# Altium PCB Steering_Converter_1R2.PcbDoc
Units mm, origin at the board's own origin, x right, y up, seen from the top; angles counter-clockwise.
Board outline 45.34 x 38.23 mm, 2 copper layers (Top Layer, Bottom Layer); 26 components, 23 nets, 105 pads, 24 vias.
Unrouted connection lines stored in the file: 23.
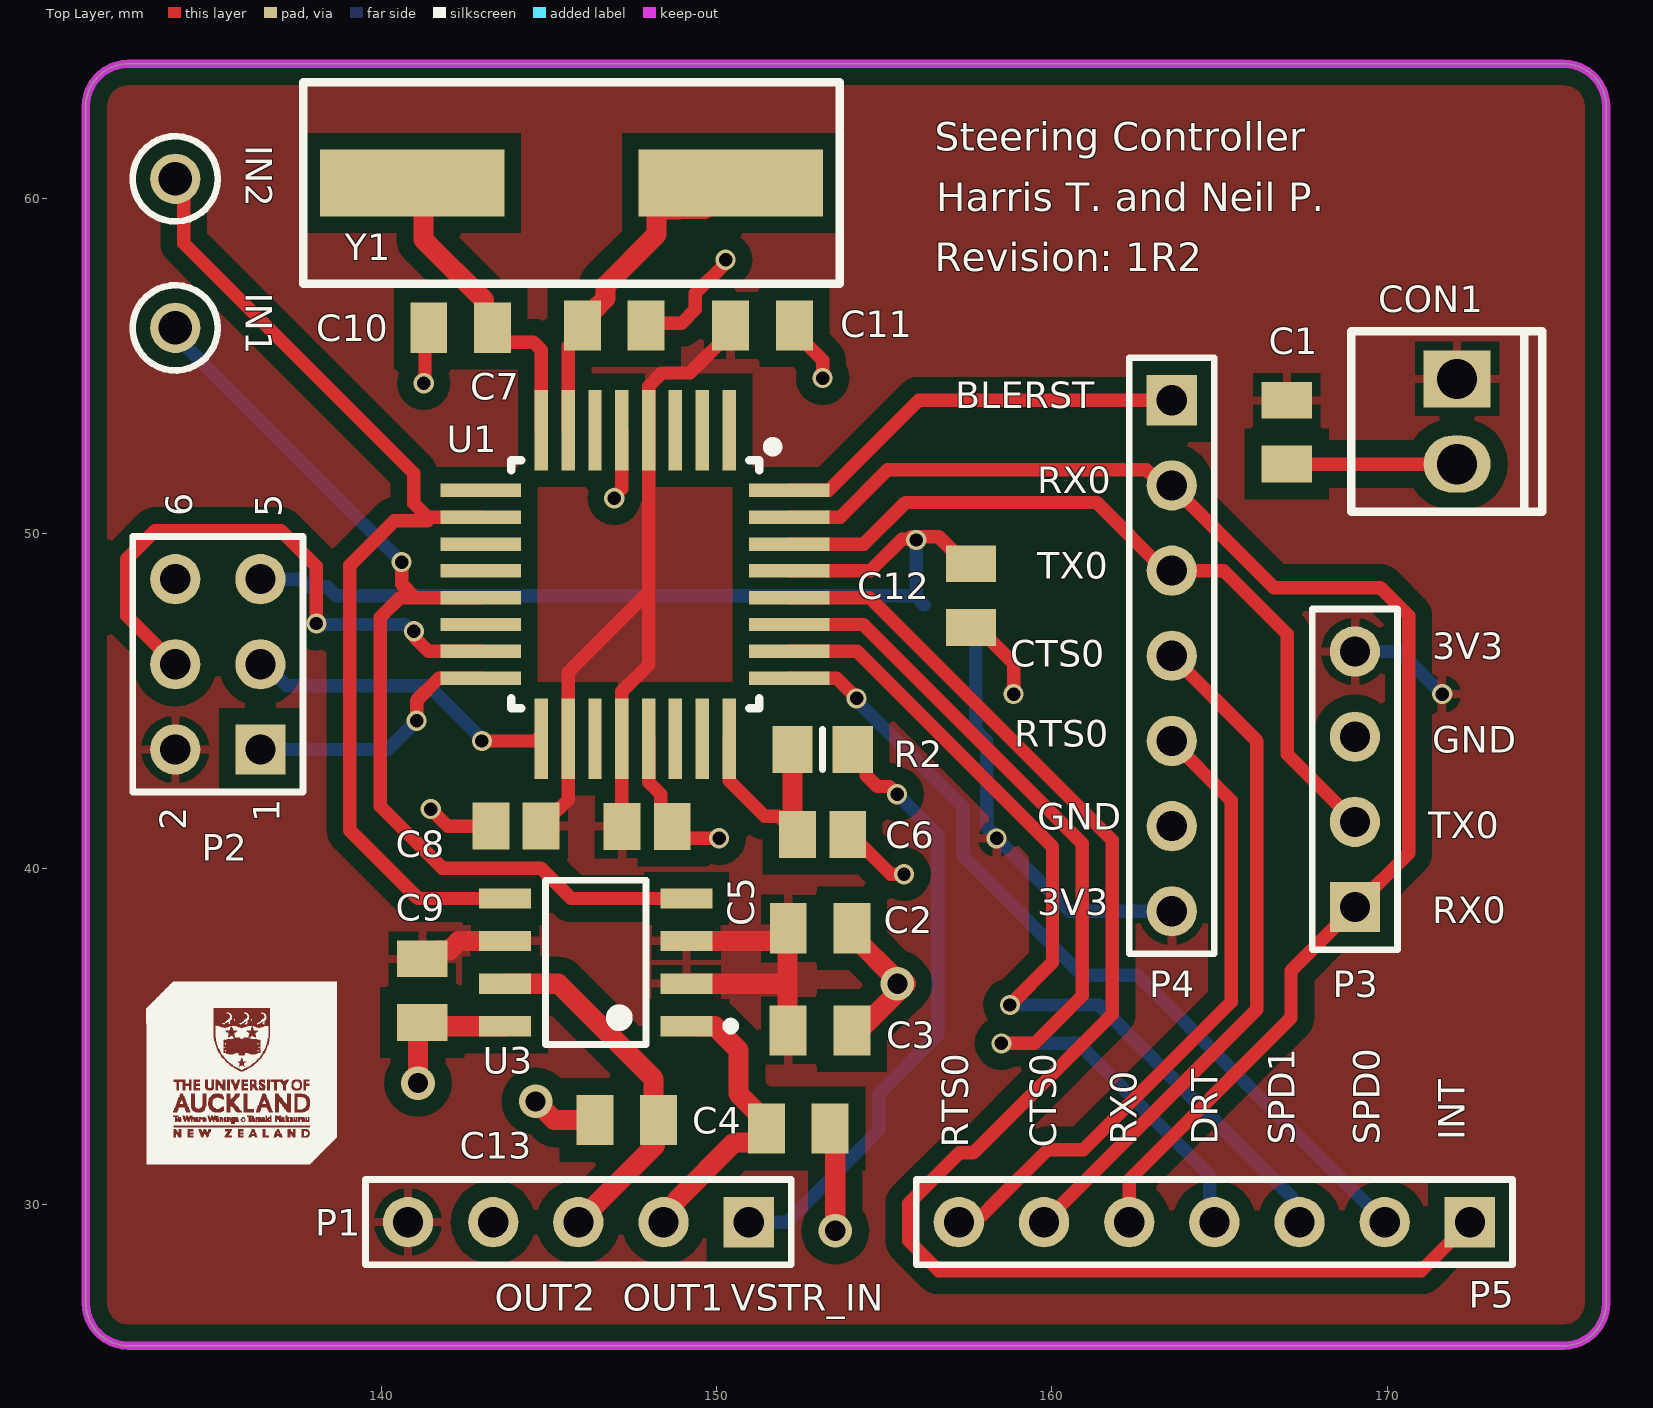
[diagram p0: Top Layer view]
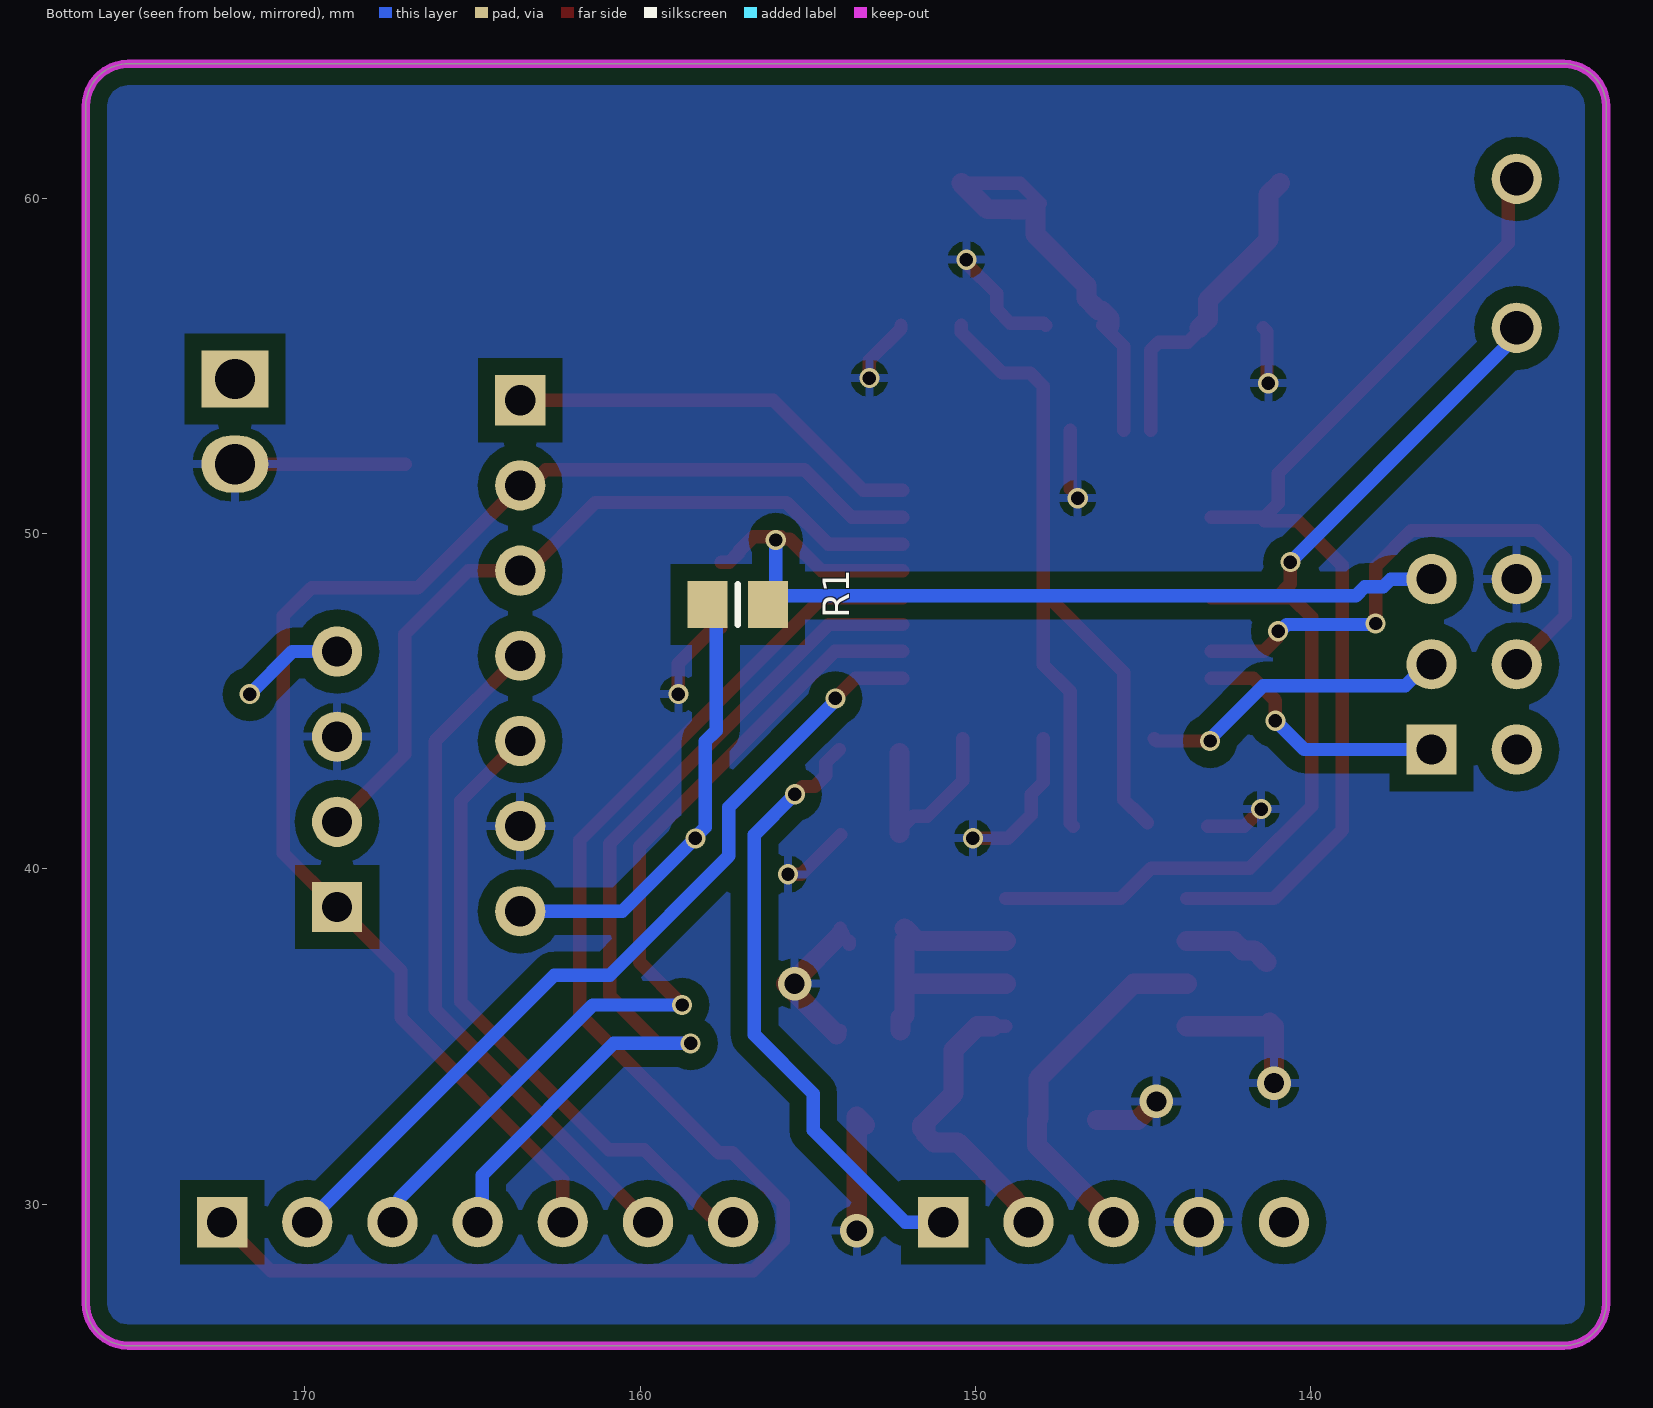
[diagram p1: Bottom Layer view, seen from below]

## Layer stack, top to bottom
Top Solder: solder mask 0.0102, Solder Resist, Dk 3.5
Top Layer: signal copper 0.0356
Dielectric 1: dielectric 0.32, FR-4, Dk 4.8
Bottom Layer: signal copper 0.0356
Bottom Solder: solder mask 0.0102, Solder Resist, Dk 3.5

## Board outline
131.191,27.051 131.191,62.738 cw(c132.461,62.738) 132.461,64.008 175.26,64.008 cw(c175.26,62.738) 176.53,62.738 176.53,27.051 cw(c175.26,27.051) 175.26,25.781 132.461,25.781 cw(c132.461,27.051)

## Design rules (kind name [scope] priority, off if disabled: settings)
Clearance Clearance_1 [InNamedPolygon('NONET_L01_P001') Or InNamedPolygon('GND_L02_P003')] p1: gap=0.4 ignorepadtopadclearanceinfootprint=FALSE
Clearance [All] p2: gap=0.5 ignorepadtopadclearanceinfootprint=TRUE except(0.3: Track-Track Track-SMDPad)
MinimumSolderMaskSliver [All] p1: minsoldermaskwidth=0.196
PolygonConnect [All] p1: connectstyle=Relief reliefconductorwidth=0.254 reliefentries=4 polygonreliefangle="90 Angle" airgapwidth=0.254
RoutingVias [All] p1: holewidth=0.711 width=1.27 viastyle="Through Hole" minholewidth=0.711 minwidth=1.27 maxholewidth=0.711 maxwidth=1.27
SilkToSolderMaskClearance [IsPad] p1: minsilkscreentomaskgap=0.2 clearancetoexposedcopper=TRUE
SolderMaskExpansion [All] p1: expansion=0.102 istentingtop=FALSE
Width [All] p1: maxlimit=0.6 minlimit=0.4 preferedwidth=0.4
28 further rules are at their usual default settings.

## Components (designator, comment, footprint, x,y, rotation, side; value= is the part's Value field where it differs from the comment)
C1 "Capacitor 0805" C0805#1 167.005,53.025 r90 top
C2 "100n" C0805#1 153.088,38.227 r180 top value=?
C3 "100n" C0805#1 153.084,35.179 r180 top value=?
C4 "100n" C0805#1 152.439,32.258 r180 top value=?
C5 "100n" C0805#2 147.929,41.27 r180 top value=?
C6 "100n" C0805#2 153.162,41.021 r180 top value=?
C7 "18p" C0805#1 146.95,56.207 r180 top value=?
C8 "100n" C0805#2 144.018,41.275 r0 top value=?
C9 "1u" C0805#1 141.224,36.369 r90 top value=?
C10 "18p" C0805#1 142.367,56.134 r0 top value=?
C11 "100n" C0805#1 151.369,56.207 r180 top value=?
C12 "100n" C0805#1 157.588,48.149 r90 top value=?
C13 "100n" C0805#1 147.32,32.512 r0 top value=?
CON1 "Header 2X1" HDR2X1_2P54 172.085,54.61 r0 top
IN1 "5003" TP_TH 133.858,56.134 r270 top
IN2 "5003" TP_TH 133.858,60.579 r270 top
P1 "Header 5" HDR1X5 150.96,29.464 r180 top
P2 "" HDR2X3 136.398,43.561 r90 top
P3 "Header 4" HDR1X4 169.037,38.862 r90 top
P4 "BLE Header" HDR1X7 163.576,53.975 r270 top
P5 "Header 7" HDR1X7 172.466,29.464 r180 top
R1 "Resistor 0805" R0805 157.088,47.879 r0 bottom value=?
R2 "Resistor 0805" R0805 153.162,43.561 r180 top value=?
U1 "ATMega328PB" TQFP32 147.574,48.487 r270 top
U3 "IC_Diodes_ZXBM5210-S-13_eec" Diodes_ZXBM5210-S-13_0 146.398,37.211 r90 top
Y1 "SMT-XTAL 8MHz" HC49-US 145.669,60.452 r180 top

## Footprints (in the part's own frame and the unit in brackets; to place one, negate y for a bottom-side part, rotate by r counter-clockwise, add the part's x,y. Pads: shape width x height; smd on the part's side, far side on the other; paste and mask are expansions set on the pad)
C0805#1 [mm]
  rect 1.1x1.5 smd: 1(-0.95,0) 2(0.95,0)
  body extent -1.1,-0.72 1.1,0.72, height 1.1
C0805#2 [mm] "Chip Capacitor, Body 2.0x1.3mm, IPC High Density"
  rect 1.1x1.4 smd: 1(-0.75,0) 2(0.75,0)
  body extent -1.1,-0.72 1.1,0.72, height 1.4
Diodes_ZXBM5210-S-13_0 [mm]
  rect 0.6x1.55 smd paste+0 mask+0: 1(-1.905,-2.7) 2(-0.635,-2.7) 3(0.635,-2.7) 4(1.905,-2.7) 5(1.905,2.7) 6(0.635,2.7) 7(-0.635,2.7) 8(-1.905,2.7)
  silkscreen extent -2.45,-4.15 2.45,1.5
HC49-US [mm] "20Mhz Crystal"
  rect 5.5x2 smd: 1(-4.75,0) 2(4.75,0)
  silkscreen extent -8,-3 8,3, body extent -4.79,-2.4 4.79,2.4, height 3.8
HDR1X4 [mm] "Connector; Header; 4 Position"
  rect 1.5x1.5 hole 0.9: 1(0,0)
  round 1.5 hole 0.9: 2(2.54,0) 3(5.08,0) 4(7.62,0)
  silkscreen extent -1.27,-1.27 8.89,1.27
HDR1X5 [mm] "Connector; Header; 5 Position"
  rect 1.5x1.5 hole 0.9: 1(0,0)
  round 1.5 hole 0.9: 2(2.54,0) 3(5.08,0) 4(7.62,0) 5(10.16,0)
  silkscreen extent -1.27,-1.27 11.43,1.27
HDR1X7 [mm] "Connector; Header; 7 Position"
  rect 1.5x1.5 hole 0.9: 1(0,0)
  round 1.5 hole 0.9: 2(2.54,0) 3(5.08,0) 4(7.62,0) 5(10.16,0) 6(12.7,0) 7(15.24,0)
  silkscreen extent -1.27,-1.27 16.51,1.27
HDR2X1_2P54 [mm] "Polarised Header 2 way"
  rect 2x1.7 hole 1.2: 1(0,0)
  oval 2x1.7 hole 1.2: 2(0,-2.54)
  silkscreen extent -3.16,-3.96 2.54,1.42, body extent -3.3,-3.64 3.17,1.44, height 9.99
HDR2X3 [mm] "Connector; Header; 3x2 Position"
  rect 1.5x1.5 hole 0.9: 1(0,0)
  round 1.5 hole 0.9: 2(0,2.54) 3(2.54,0) 4(2.54,2.54) 5(5.08,0) 6(5.08,2.54)
  silkscreen extent -1.27,-1.27 6.35,3.81
R0805 [mm]
  rect 1.2x1.4 smd: 1(-0.9,0) 2(0.9,0)
  silkscreen extent 0,-0.6 0,0.6, body extent -1.07,-0.7 1.07,0.7, height 0.65
TP_TH [mm] "Test Point, Through Hole, Dia 2.54mm"
  round 1.5 hole 1: 1(0,0)
  silkscreen extent -1.27,-1.27 1.27,1.27, body extent -1.27,-1.27 1.27,1.27, height 4.57
TQFP32 [mm]
  rect 2.4x0.4 smd: 1(-4.6,2.8) 2(-4.6,2) 3(-4.6,1.2) 4(-4.6,0.4) 5(-4.6,-0.4) 6(-4.6,-1.2) 7(-4.6,-2) 8(-4.6,-2.8) 17(4.6,-2.8) 18(4.6,-2) 19(4.6,-1.2) 20(4.6,-0.4) 21(4.6,0.4) 22(4.6,1.2) 23(4.6,2) 24(4.6,2.8)
  rect 0.4x2.4 smd: 9(-2.8,-4.6) 10(-2,-4.6) 11(-1.2,-4.6) 12(-0.4,-4.6) 13(0.4,-4.6) 14(1.2,-4.6) 15(2,-4.6) 16(2.8,-4.6) 25(2.8,4.6) 26(2,4.6) 27(1.2,4.6) 28(0.4,4.6) 29(-0.4,4.6) 30(-1.2,4.6) 31(-2,4.6) 32(-2.8,4.6)
  silkscreen extent -4.24,-3.7 3.7,4.24, body extent -3.5,-3.5 3.5,3.5, height 1.3

## Part data
C1: library part CCAP0805, "CCAP0805"
C2 C3 C4 C5 C6 C7 C8 C9 C10 C11 C12 C13: library part CCAP0805, "CCAP0805", MPN=?, Part Description=?, Type="Surface Mount"
  C5: Supplier 1=Digi-Key
CON1: library part HDR2X1
IN1 IN2: library part TestPoint, "Test Point, Orange, 1-Pin THD, RoHS", Forward Current="3 A", Forward Voltage="1.08 V", Max Operating Temperature="150 degC", Max Surge Current="80 A", Min Operating Temperature="-65 degC", Package Quantity=500, Peak Reverse Current="600 uA", ComponentLink1Description="Manufacturer URL", ComponentLink1URL=http://www.keyelco.com/, ComponentLink2Description=Datasheet, ComponentLink2URL=http://keyelco.com/userAssets/file/M65p56.pdf, DatasheetVersion=Jun-15, Diameter="5.3 mm", Height="0.25 inch", Length="9.5 mm", Mount="Through Hole", PackageDescription="1-Pin Through Hole Device, Dia 2.54 mm", PackageReference=5003, Packaging=Bulk, Pins=2, Radiation Hardening=No, REACH SVHC="No SVHC", RoHSCompliant=true, Weight="0.01 lb", Width="0.25 inch"
P1: "Header, 5-Pin", LatestRevisionDate=17-Jul-2002, LatestRevisionNote="Re-released for DXP Platform.", Publisher="Altium Limited"
P2: library part "Header 3X2", "Header, 3-Pin, Dual row", LatestRevisionDate=17-Jul-2002, LatestRevisionNote="Re-released for DXP Platform.", Publisher="Altium Limited"
P3: "Header, 4-Pin", LatestRevisionDate=17-Jul-2002, LatestRevisionNote="Re-released for DXP Platform.", Publisher="Altium Limited"
P4: library part "Header 7", "Header, 7-Pin", LatestRevisionDate=17-Jul-2002, LatestRevisionNote="Re-released for DXP Platform.", Publisher="Altium Limited"
P5: "Header, 7-Pin", LatestRevisionDate=17-Jul-2002, LatestRevisionNote="Re-released for DXP Platform.", Publisher="Altium Limited"
R1 R2: library part RES0805, "RES0805", MPN=?, Part Description=?, Type="Surface Mount"
U1: "IC MCU 8BIT 32KB FLASH 32TQFP", Supplier Part Number 1=ATMEGA328PB-AU-ND, Supplier 1=Digi-Key, Supplier 2=Digi-Key, Supplier 3=Digi-Key, Supplier 4=Digi-Key
U3: "IC MOTOR DRIVER PWM 8SOIC", Digikey Part Number=ZXBM5210-S-13DICT-ND, Manufacturer=Diodes, Mouser Part Number=621-ZXBM5210-S-13, Package=SO-8, Part Number=ZXBM5210-S-13, Temperature="-40°C to +85°C", Temperature Range High=+85°C, Temperature Range Low=-40°C, Voltage=18V, ComponentLink1Description=Upverter, ComponentLink1URL=https://upverter.com/upn/revision/7a867377f73a3c32/, ComponentLink2Description=Datasheet, ComponentLink2URL=https://www.diodes.com/assets/Datasheets/ZXBM5210.pdf, Digikey Description="IC MOTOR DRIVER PWM 8SOIC", helpURL=https://upverter.com/upn/revision/7a867377f73a3c32/, Lead Free=yes, Price=0.759009212461, RoHS=TRUE, Supplier 1=Digi-Key, Supplier 2=Mouser, Supplier Part Number 1=ZXBM5210-S-13DICT-ND, Supplier Part Number 2=621-ZXBM5210-S-13
Y1: library part TXC9C-16_XTAL_SMT, "9C-16.000MAAJ-T crystal 16.0000MHZ 18PF SMD", Frequency Stability=±30ppm, Load Capacitance=18pF, Manufacturer="TXC CORPORATION", Manufacturer Part Number=9C-16.000MAAJ-T, Operating Mode=Fundamental, Operating Temperature="-20°C ~ 70°C", Package / Case=HC-49/US, Ratings=-, Supplier Part Number 1=887-1059-1-ND, Category="Crystals, Oscillators, Resonators", ComponentLink1Description=http://www.txccorp.com/download/products/quartz_crystals/2015TXC_9C_32.pdf, ComponentLink1URL=http://www.txccorp.com/download/products/quartz_crystals/2015TXC_9C_32.pdf, Frequency Tolerance=±30ppm, Height - Seated (Max)="0.161\" (4.10mm)", Mounting Type="Surface Mount", Packaging="Cut Tape (CT)", Part Status=Active, Pricing 1="1=0.75, 10=0.628, 50=0.5656, 100=0.5026, 500=0.47744 (NZD)", RoHS="RoHS Compliant", Size / Dimension="0.449\" L x 0.189\" W (11.40mm x 4.80mm)", Stock 1=11514, Supplier 1=Digi-Key, Type="MHz Crystal"

## Via types
v1: diameter 0.6, hole 0.4, Top Layer to Bottom Layer, 20 vias
v2: diameter 1, hole 0.6, Top Layer to Bottom Layer, 4 vias

## Nets (pads, with @x,y where several pads share a name; then routed paths per layer and width w, separated by ;. In a path a pad name is that pad's centre, name@x,y a point inside that pad or via, vN(x,y) a via of type N, cw(c..) or ccw(c..) an arc to the next point about the centre after c; other vN are vias at no path point)
3V3: C1.2 C2.2 C3.2 C5.2 C8.2 C9.2 C11.2 CON1.1 P1.5 P2.2 P3.4 P4.7 R1.2 U1.4 U1.18 U1.20 U3.2 U3.3 U3.6 | length 52.7
  Top Layer w0.4: C8.2@144.868,41.375 145.318,41.825 145.34,41.825 145.574,42.059 U1.18@145.574,43.787 ; U1.18 145.574,45.86 147.974,48.26 ; C5.2@147.079,41.27 147.174,41.365 U1.20 147.174,45.289 147.974,46.089 147.974,48.26 ; C11.2 150.419,56.007 149.199,54.787 148.367,54.787 147.974,54.394 U1.4 147.974,48.26 ; P4.7 P4.7@163.786,38.525
  Top Layer w0.6: C9.2@141.324,37.219 141.674,37.569 142.027,37.569 142.304,37.846 U3.6 ; U3.2 152.111,36.576 ; U3.3 151.73,37.846 C2.2@152.111,38.227 ; C3.2@152.111,35.629 152.111,36.576 ; C2.2@152.111,37.846 152.111,36.576 ; C3.2@152.165,35.629 152.234,35.56 C3.2@152.234,35.179
  Bottom Layer w0.4: R1.2@157.734,47.23 157.734,44.125 158.053,43.806 158.053,41.244 158.353,40.944 v1(158.353,40.91) 160.528,38.735 P4.7 ; P3.4@168.833,46.482 170.37,46.482 v1(171.641,45.212)
BLE_RST: P4.1 U1.32 | length 13.1
  Top Layer w0.4: U1.32 153.341,51.287 156.029,53.975 P4.1
  Bottom Layer w0.6: P4.1 P4.1@163.957,54.356
CTS_0: P4.4 P5.6 | length 20.6
  Top Layer w0.4: P5.6 166.116,35.814 166.116,43.815 P4.4
DRT: P5.4 U1.27 | length 28.3
  Top Layer w0.4: U1.27 154.38,47.287 160.909,40.758 160.909,36.222 159.485,34.798 v1(158.496,34.798)
  Bottom Layer w0.4: v1(158.496,34.798) 160.782,34.798 164.712,30.868 164.712,29.598 P5.4
GND: C1.1 C2.1 C3.1 C4.1 C5.1 C6.1 C7.1 C8.1 C9.1 C10.1 C11.1 C12.1 C13.1 CON1.2 P1.4 P2.6 P3.3 P4.6 U1.5 U1.21 U3.8 | length 40.3
  Top Layer w0.4: v1(141.267,54.483) 141.305,54.521 141.305,56.022 C10.1 ; v1(141.478,41.783) 141.986,41.275 C8.1@143.068,41.275 ; v2(144.605,33.068) v2@144.661,33.012 ; C13.1 C13.1@146.47,32.512 ; v1@146.95,51.108 147.174,51.332 U1.5 ; C7.1 147.968,56.275 148.957,56.275 149.369,56.687 149.369,57.164 150.269,58.064 v1(150.269,58.166) ; U1.21 147.974,42.58 148.332,42.222 148.332,41.615 149.029,40.918 150.074,40.918 v1(150.077,40.915) ; C11.1@152.219,56.207 152.219,56.107 153.162,55.164 v1(153.162,54.635) ; C2.1@153.758,37.746 C2.1@153.758,37.846 ; C6.1@154.012,41.021 155.194,39.839 v1(155.591,39.839) ; C3.1 C3.1@154.144,35.069 ; C2.1@154.038,38.027 C2.1 ; C12.1 157.788,47.199 158.861,46.126 v1(158.861,45.212) ; C1.1 167.007,52.072 172.083,52.072 CON1.2
  Top Layer w0.6: v2(141.097,33.612) 141.097,35.292 C9.1 141.337,35.306 U3.8 ; v2@144.661,33.012 145.161,32.512 C13.1 ; C4.1@153.289,32.358 153.539,32.608 v2(153.539,29.21) ; C2.1@154.038,38.027 155.391,36.674 v2(155.391,36.576) ; C3.1@154.144,35.069 155.651,36.576 v2@155.489,36.576
  other v1: 146.95,51.054
IN1: IN1.1 U1.13 U3.4 | length 29.9
  Top Layer w0.4: v1(140.61,49.149) 140.61,48.497 141.02,48.087 ; U1.13 141.02,48.087 ; U3.4 145.669,39.116 144.76,40.025 141.822,40.025 139.974,41.873 139.974,47.501 140.56,48.087 141.02,48.087
  Bottom Layer w0.4: IN1.1@133.884,55.875 135.403,54.356 v1(140.61,49.149)
IN2: IN2.1 U1.10 U3.5 | length 31
  Top Layer w0.4: IN2.1@134.239,60.579 134.112,60.452 134.112,58.66 140.974,51.798 140.974,50.903 141.39,50.487 141.857,50.487 U1.10 ; 141.39,50.387 140.394,50.387 139.067,49.06 139.067,41.146 141.097,39.116 U3.5
MISO: P2.1 U1.16 | length 7.9
  Top Layer w0.4: v1(141.053,44.417) 141.053,45.022 141.718,45.687 U1.16
  Bottom Layer w0.4: P2.1 140.198,43.561 v1(141.053,44.417) v1@140.958,44.417
MOSI: P2.4 U1.15 | length 17.3
  Top Layer w0.4: P2.4 132.408,47.551 132.408,49.242 133.257,50.091 136.999,50.091 138.067,49.023 v1(138.067,47.319) ; v1(140.974,47.087) 141.012,47.049 141.012,46.875 141.4,46.487 U1.15
  Bottom Layer w0.4: v1(138.067,47.319) 138.099,47.287 140.72,47.287 140.92,47.087 v1(140.974,47.087)
OUT1: C4.2 P1.2 U3.1 | length 9.1
  Top Layer w0.4: U3.1 U3.1@149.479,35.306
  Top Layer w0.6: P1.2 148.42,29.708 148.853,30.141 148.853,30.164 150.531,31.843 151.239,31.843 151.489,32.093 C4.2 ; U3.1@149.479,35.306 149.947,35.306 150.65,34.603 150.65,33.297 151.589,32.358 C4.2@151.589,32.258
OUT2: C13.2 P1.3 U3.7 | length 10.8
  Top Layer w0.6: U3.7 145.288,36.576 148.125,33.739 148.125,32.557 148.17,32.512 148.17,31.754 P1.3
RST: C12.2 P2.5 R1.1 U1.29 | length 28
  Top Layer w0.4: U1.29 154.584,48.887 155.534,49.837 v1@155.956,49.837 ; v1@155.81,49.899 156.634,49.899 157.038,49.495 157.038,49.449 157.342,49.145 C12.2@157.588,49.145
  Bottom Layer w0.4: P2.5 137.617,48.641 137.843,48.415 138.385,48.415 138.651,48.149 R1.1@155.918,48.149 ; v1(155.956,49.809) 155.956,48.111 R1.1
RTS_0: P4.5 P5.7 | length 19
  Top Layer w0.4: P5.7@157.6,29.54 157.734,29.674 157.926,29.674 158.316,30.065 159.874,31.623 160.935,31.623 165.354,36.042 165.354,42.037 P4.5
RX_0: P3.1 P4.2 P5.5 U1.31 | length 42.4
  Top Layer w0.4: U1.31 153.685,50.487 155.097,51.899 162.815,51.899 163.278,51.435 P4.2 166.624,48.387 169.799,48.387 170.641,47.545 170.641,40.466 P3.1 167.132,36.957 167.132,35.56 162.306,30.734 P5.5
SCK: P2.3 U1.17 | length 9.3
  Top Layer w0.4: v1(143.002,43.815) 144.602,43.815 U1.17@144.674,43.887
  Bottom Layer w0.4: P2.3 136.547,46.101 137.182,45.466 141.419,45.466 143.002,43.883 v1(143.002,43.815)
SPD_0: P5.2 U1.25 | length 25.4
  Top Layer w0.4: U1.25 153.583,45.687 154.178,45.092 v1(154.178,45.085)
  Bottom Layer w0.4: v1(154.178,45.085) 154.178,45.011 157.353,41.836 157.353,40.386 160.909,36.83 162.56,36.83 P5.2
SPD_1: P5.3 U1.26 | length 27.1
  Top Layer w0.4: U1.26 154.19,46.487 160.02,40.657 160.02,37.211 v1(158.75,35.941)
  Bottom Layer w0.4: v1(158.75,35.941) 161.417,35.941 167.176,30.182 167.176,29.674 P5.3
ST_INT: P5.1 U1.28 | length 45
  Top Layer w0.4: U1.28 154.57,48.087 161.798,40.859 161.798,35.67 157.661,31.533 157.244,31.533 155.731,30.02 155.731,28.908 156.625,28.014 171.016,28.014 P5.1
TX_0: P3.2 P4.3 U1.30 | length 23.4
  Top Layer w0.4: U1.30 154.394,49.687 155.634,50.927 161.334,50.927 163.366,48.895 165.126,48.895 167.022,46.999 167.022,43.417 P3.2
VSTR_IN: P1.1 R2.1 | length 18.4
  Top Layer w0.4: R2.1 154.462,43.161 154.462,42.785 154.79,42.456 155.156,42.456 v1(155.386,42.226)
  Bottom Layer w0.4: P1.1 152.096,29.464 154.838,32.206 154.838,33.297 156.591,35.05 156.591,41.021 v1(155.386,42.226)
VSTR_OUT: C6.2 R2.2 U1.24 | length 6.4
  Top Layer w0.4: U1.24 150.374,42.631 151.434,41.571 151.862,41.571 152.212,41.221 C6.2@152.212,41.021 ; R2.2@152.262,43.461 R2.2
  Top Layer w0.6: C6.2@152.262,41.071 R2.2@152.262,43.461
X1: C7.2 U1.7 Y1.1 | length 12.9
  Top Layer w0.4: U1.7 145.574,55.581 C7.2@146.2,56.207 ; Y1.1@148.072,59.855 148.669,60.452 Y1.1
  Top Layer w0.6: C7.2 146,56.407 146.25,56.657 146.336,56.657 146.687,57.008 146.687,57.394 148.206,58.913 148.206,59.657 149.643,59.676 Y1.1
X2: C10.2 U1.8 Y1.2 | length 9.2
  Top Layer w0.4: C10.2@143.444,55.93 143.667,55.707 144.54,55.707 144.774,55.473 U1.8
  Top Layer w0.6: Y1.2 141.256,60.115 141.256,58.769 143.067,56.958 143.067,56.384 C10.2
pads on no net: U1.1 U1.2 U1.3 U1.6 U1.9 U1.11 U1.12 U1.14 U1.19 U1.22 U1.23

## Polygon pours and split planes (outlines as drawn)
3V3 on Top Layer "3V3_L01_P001" (solid, remove dead copper, pour order 1): 131.191,62.992 cw(c132.207,62.992) 132.207,64.008 175.26,64.008 cw(c175.26,62.738) 176.53,62.738 176.53,27.051 cw(c175.26,27.051) 175.26,25.781 132.461,25.781 cw(c132.461,27.051) 131.191,27.051
GND on Bottom Layer "GND_L02_P002" (solid, remove dead copper, pour order 2): 131.205,62.929 131.205,63.066 cw(c132.093,63.066) 132.093,63.953 175.205,63.953 ccw(c175.205,64.008) 175.26,64.008 cw(c175.26,62.738) 176.53,62.738 176.53,27.051 cw(c175.26,27.051) 175.26,25.781 132.147,25.781 cw(c132.147,25.836) 132.093,25.836 cw(c132.093,26.737) 131.191,26.737 131.191,27.051

## Keep-outs
Keep-Out Layer:
  lines w0.254: 131.191,27.051 ccw(c132.461,27.051) 132.461,25.781 175.26,25.781 ccw(c175.26,27.051) 176.53,27.051 176.53,62.738 ccw(c175.26,62.738) 175.26,64.008 172.339,64.008 132.461,64.008 ccw(c132.461,62.738) 131.191,62.738 131.191,27.051

## Silkscreen, mask and mechanical layers (free items; w line width, h text height)
Top Overlay:
  drawing of 24 lines, arcs and shapes, not listed
  text "Steering Controller" at 156.507,61.413 h0.85
  text "Harris T. and Neil P." at 156.556,59.606 h0.85
  text "Revision: 1R2" at 156.507,57.828 h0.85
  text "BLERST" at 157.122,53.744 h0.8
  text "RX0" at 159.557,51.204 h0.8
  text "TX0" at 159.557,48.648 h0.8
  text "3V3" at 171.346,46.251 h0.8
  text "CTS0" at 158.757,46.029 h0.8
  text "RTS0" at 158.884,43.639 h0.8
  text "GND" at 171.346,43.457 h0.8
  text "GND" at 159.557,41.171 h0.8
  text "TX0" at 171.219,40.917 h0.8
  text "3V3" at 159.557,38.615 h0.8
  text "RX0" at 171.346,38.377 h0.8
  text "INT" at 172.316,31.9 h0.8 r90
  text "RX0" at 162.537,31.773 h0.8 r90
  text "DRT" at 164.95,31.773 h0.8 r90
  text "SPD1" at 167.236,31.773 h0.8 r90
  text "SPD0" at 169.776,31.773 h0.8 r90
  text "RTS0" at 157.511,31.683 h0.8 r90
  text "CTS0" at 160.124,31.683 h0.8 r90
  text "OUT2" at 143.389,26.82 h0.8
  text "OUT1" at 147.197,26.82 h0.8
  text "VSTR_IN" at 150.417,26.826 h0.8

## Text inside footprints (layer, text, board x,y; h text height)
P2: Top Overlay "5" at 137.028,50.487 h0.8 r90; Top Overlay "6" at 134.364,50.524 h0.8 r90; Top Overlay "2" at 134.184,41.146 h0.8 r90; Top Overlay "1" at 136.978,41.384 h0.8 r90